# EAGLE board 2 layers lite (EAGLE 8.0.2)
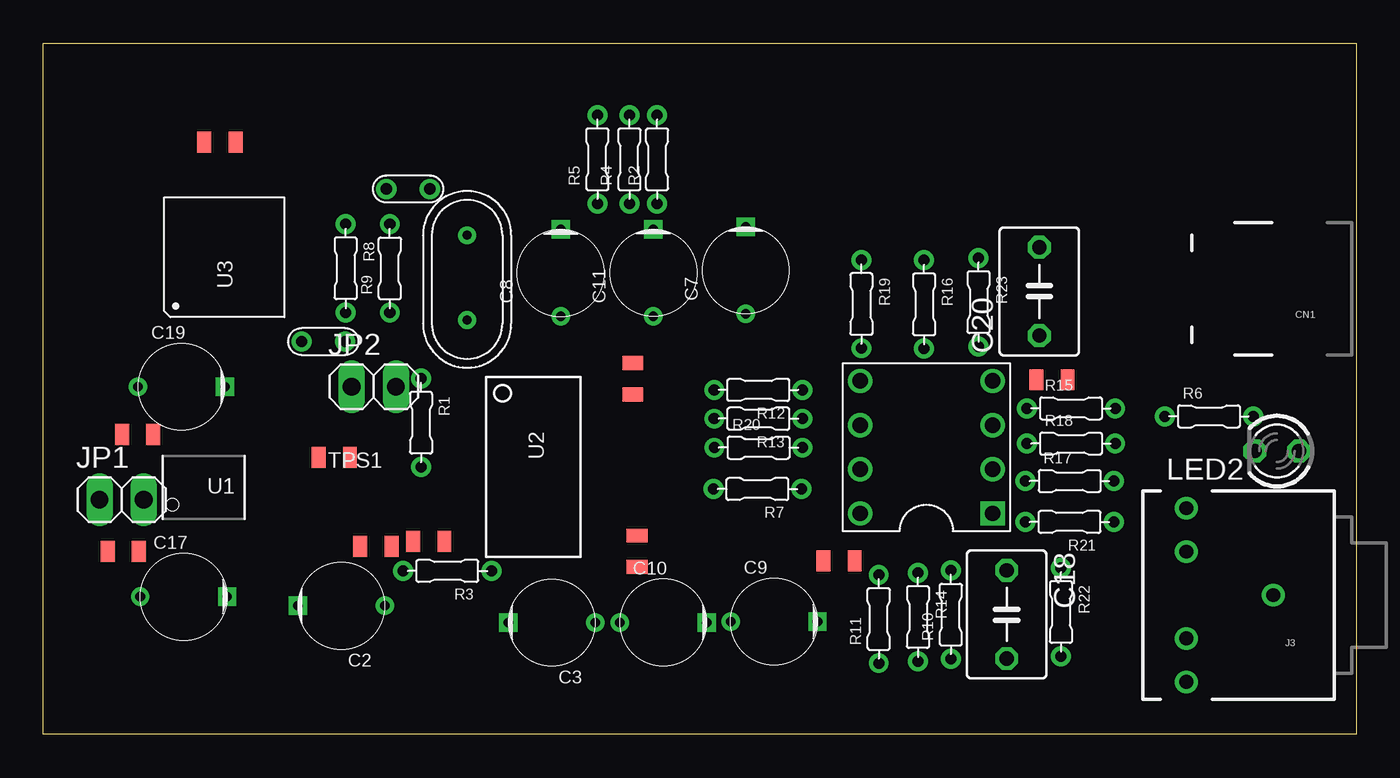
[diagram p0: board, top side]
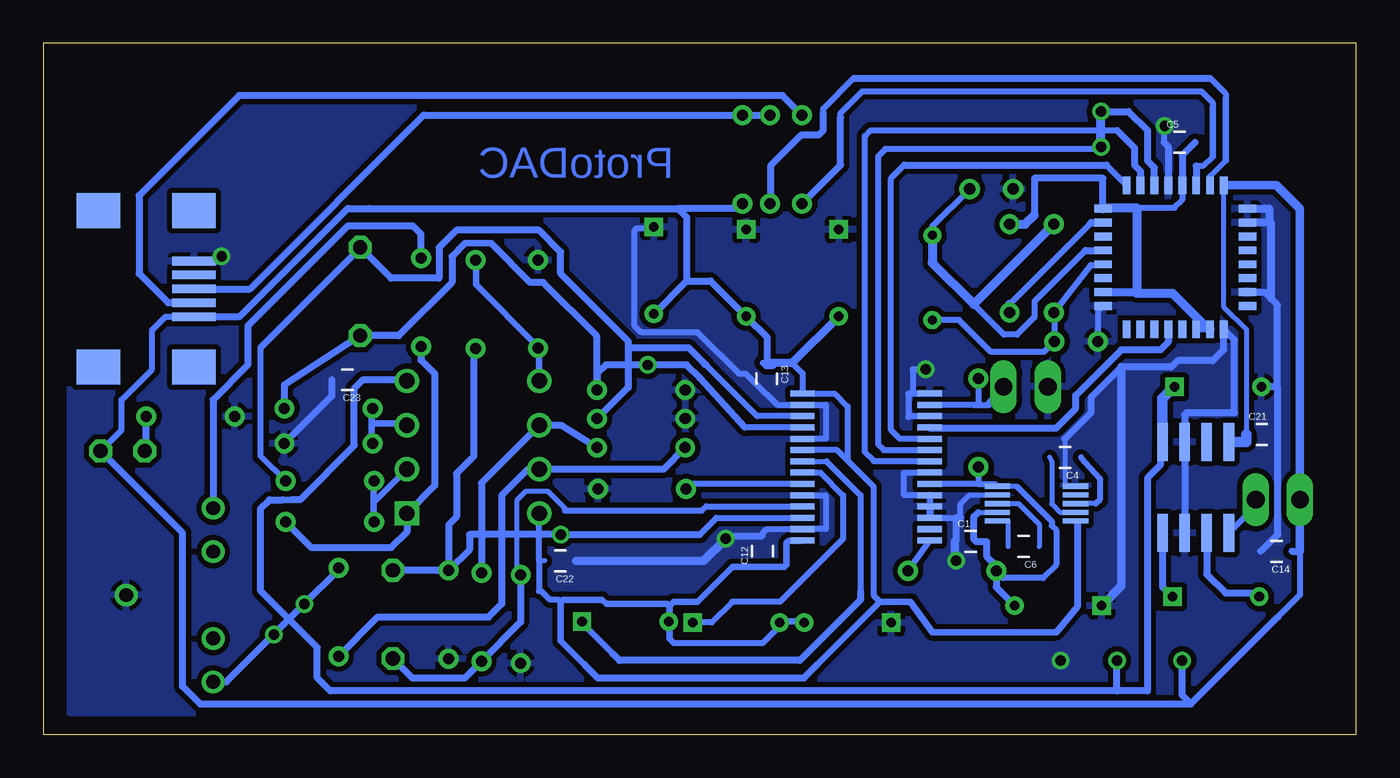
[diagram p1: board, bottom side, seen from below]

Size 75.5 x 39.75 mm. Coordinates in mm from the lower left corner, seen from the top.
Outline: 0,39.75 75.5,39.75 75.5,0 0,0 0,39.75
Copper layers (1*16): layer 1 0.035mm / dielectric 1.5mm / Bottom 0.035mm
Design rules "default *": minimum track width 0.25mm, minimum drill 0.5mm, track to track 0.3mm, track to pad 0.3mm, pad to pad 0.3mm, via to via 0.3mm, smd to smd 0.3mm, copper to edge 40mil, drill to drill 8mil, minimum pad ring 10mil, minimum via ring 8mil, stop-mask expansion 4mil, vias tented up to drill 0mil, thermal gap 10mil

## Footprints (pad centres in the part's own frame; a part is rotated, then mirrored left to right if it is on the bottom)
0805 = smd 0.8 x 1.2 bottom: 1 -0.9,0; 2 0.9,0
10UF/16V_PANA_M_CAP = drill 0.55 pad 0.95: + -2.5,0 | drill 0.55 pad 0.95 square: - 2.5,0
4.7PF_CAP = drill 0.65 pad 1: 1 -1.25,0; 2 1.25,0
C050-045X075 = drill 0.813 octagon: 1 -2.54,0; 2 2.54,0
USB-MINIB = smd 2.5 x 0.5 bottom: D+ 2.5,0; D- 2.5,0.8; GND 2.5,-1.6; ID 2.5,-0.8; VBUS 2.5,1.6 | smd 2.5 x 2 bottom: MTN1 -3,4.5; MTN2 2.5,4.5; MTN3 -3,-4.5; MTN4 2.5,-4.5
AUDIO-JACK = drill 0.8: RING 5,5; RSH 5,2.5; SLEEVE 0,0; TIP 5,-5; TSH 5,-2.5
1X02 = drill 1.016 long: 1 -1.27,0; 2 1.27,0
LED3MM = drill 0.813 octagon: A -1.27,0; K 1.27,0
DIP-8 = drill 0.889 square: 1 -3.81,0 | drill 0.889: 2 -3.81,-2.54; 3 -3.81,-5.08; 4 -3.81,-7.62; 5 3.81,-7.62; 6 3.81,-5.08; 7 3.81,-2.54; 8 3.81,0
1-8W_RES = drill 0.635 pad 1.143: P$1 2.54,0; P$2 -2.54,0
DGS-10-BOTTOM_LYR = smd 1.45 x 0.3 bottom: 1 -2.25,1; 2 -2.25,0.5; 3 -2.25,0; 4 -2.25,-0.5; 5 -2.25,-1; 6 2.25,-1; 7 2.25,-0.5; 8 2.25,0; 9 2.25,0.5; 10 2.25,1
SOIC-8_BOTTOM-LYR = smd 2.21 x 0.61 bottom: 1 -2.616,1.905; 2 -2.616,0.635; 3 -2.616,-0.635; 4 -2.616,-1.905; 5 2.616,-1.905; 6 2.616,-0.635; 7 2.616,0.635; 8 2.616,1.905
DB_R-PDSO-G28-BOTTOM_LYR = smd 0.348 x 1.397 bottom: 1 -4.225,-3.656; 2 -3.575,-3.656; 3 -2.925,-3.656; 4 -2.275,-3.656; 5 -1.625,-3.656; 6 -0.975,-3.656; 7 -0.325,-3.656; 8 0.325,-3.656; 9 0.975,-3.656; 10 1.625,-3.656; 11 2.275,-3.656; 12 2.925,-3.656; 13 3.575,-3.656; 14 4.225,-3.656; 15 4.225,3.656; 16 3.575,3.656; 17 2.925,3.656; 18 2.275,3.656; 19 1.625,3.656; 20 0.975,3.656; 21 0.325,3.656; 22 -0.325,3.656; 23 -0.975,3.656; 24 -1.625,3.656; 25 -2.275,3.656; 26 -2.925,3.656; 27 -3.575,3.656; 28 -4.225,3.656
PJT_(QFP-32)-BOTTOM_LYR = smd 1 x 0.45 bottom: 1 -4.15,2.8; 2 -4.15,2; 3 -4.15,1.2; 4 -4.15,0.4; 5 -4.15,-0.4; 6 -4.15,-1.2; 7 -4.15,-2; 8 -4.15,-2.8; 17 4.15,-2.8; 18 4.15,-2; 19 4.15,-1.2; 20 4.15,-0.4; 21 4.15,0.4; 22 4.15,1.2; 23 4.15,2; 24 4.15,2.8 | smd 0.45 x 1 bottom: 9 -2.8,-4.15; 10 -2,-4.15; 11 -1.2,-4.15; 12 -0.4,-4.15; 13 0.4,-4.15; 14 1.2,-4.15; 15 2,-4.15; 16 2.8,-4.15; 25 2.8,4.15; 26 2,4.15; 27 1.2,4.15; 28 0.4,4.15; 29 -0.4,4.15; 30 -1.2,4.15; 31 -2,4.15; 32 -2.8,4.15
CRYSTAL = drill 0.508 pad 0.889: 1 -4.877,0; 2 0,0

## Placement (x,y rotation side)
C1  150nF  [0805]  22.16,11.09 0 bottom
C2  10uF  [10UF/16V_PANA_M_CAP]  17.13,7.39 180 top
C3  4.7uF  [10UF/16V_PANA_M_CAP]  29.24,6.42 180 top
C4  1uF  [0805]  16.72,15.93 180 bottom
C5  1uf  [0805]  10.15,34.06 0 bottom
C6  1uF  [0805]  19.12,10.8 180 bottom
C7  10uF  [10UF/16V_PANA_M_CAP]  40.39,26.7 90 top
C8  10uF  [10UF/16V_PANA_M_CAP]  29.75,26.54 90 top
C9  47uf  [10UF/16V_PANA_M_CAP]  42.02,6.48 0 top
C10  47uf  [10UF/16V_PANA_M_CAP]  35.65,6.44 0 top
C11  10uF  [10UF/16V_PANA_M_CAP]  35.08,26.55 90 top
C12  150nF  [0805]  34.15,10.53 90 bottom
C13  150nF  [0805]  33.9,20.46 270 bottom
C14  150nF  [0805]  4.59,10.53 180 bottom
C15  4.7pF  [4.7PF_CAP]  20.97,31.37 180 top
C16  4.7pF  [4.7PF_CAP]  16.1,22.6 180 top
C17  47uF  [10UF/16V_PANA_M_CAP]  8.06,7.92 0 top
C18  220pF  [C050-045X075]  55.4,6.9 270 top
C19  47uF  [10UF/16V_PANA_M_CAP]  7.94,20 0 top
C20  220pF  [C050-045X075]  57.28,25.48 90 top
C21  150nF  [0805]  5.42,17.26 0 bottom
C22  220nF  [0805]  45.77,9.98 180 bottom
C23  220nF  [0805]  58.01,20.4 180 bottom
CN1  USB-MINIBBOTTOM  [USB-MINIB]  69.34,25.63 180 top
J3  [AUDIO-JACK]  70.74,8.01 180 top
JP1  [1X02]  4.5,13.5 0 top
JP2  [1X02]  19,20 0 top
LED2  [LED3MM]  70.95,16.3 180 top
OPA2132  OPA2132DIP8  [DIP-8]  50.79,12.71 180 top
R1  10K  [1-8W_RES]  21.72,17.93 270 top
R2  1.5K  [1-8W_RES]  35.3,33.09 90 top
R3  10K  [1-8W_RES]  23.23,9.4 180 top
R4  22R  [1-8W_RES]  33.7,33.09 90 top
R5  22R  [1-8W_RES]  31.86,33.09 90 top
R6  820  [1-8W_RES]  67.04,18.3 0 top
R7  10K  [1-8W_RES]  41.07,14.11 180 top
R8  1M  [1-8W_RES]  17.38,26.81 270 top
R9  1.5K  [1-8W_RES]  19.92,26.81 90 top
R10  22  [1-8W_RES]  52.19,6.89 90 top
R11  22  [1-8W_RES]  48.04,6.64 90 top
R12  22  [1-8W_RES]  41.12,19.81 180 top
R13  22  [1-8W_RES]  41.12,18.16 180 top
R14  100  [1-8W_RES]  50.31,6.74 270 top
R15  100  [1-8W_RES]  59.1,18.76 0 top
R16  100  [1-8W_RES]  50.66,24.74 270 top
R17  100  [1-8W_RES]  59.02,14.57 0 top
R18  820  [1-8W_RES]  59.1,16.73 0 top
R19  820  [1-8W_RES]  47.05,24.75 270 top
R20  820  [1-8W_RES]  41.13,16.49 0 top
R21  820  [1-8W_RES]  59.02,12.22 180 top
R22  10  [1-8W_RES]  58.53,7.04 270 top
R23  10  [1-8W_RES]  53.78,24.86 270 top
TPS1  TPS60501DGS-10-BOTTOM  [DGS-10-BOTTOM_LYR]  18.38,13.27 0 top
U1  LM2662SO8-BOTTOM  [SOIC-8_BOTTOM-LYR]  9.23,14.2 90 top
U2  PCM1794ADB_R-PDSO-G28-BOTTOM  [DB_R-PDSO-G28-BOTTOM_LYR]  28.18,15.38 270 top
U3  PCM2707QFP-32-BOTTOM  [PJT_(QFP-32)-BOTTOM_LYR]  10.4,27.45 90 top
X1  12MHZ  [CRYSTAL]  24.37,28.72 90 top

## Library data of the parts
C1 C4-C6 C12-C14 C21 = SparkFun-Capacitors
C2 C3 C7-C11 C15-C17 C19 R1-R23 X1 = joe's favorites
C18 C20 = resistor
C22 C23 = SparkFun-Capacitors; PROD_ID: CAP-08402; VALUE: 22uF
CN1 J3 = SparkFun-Connectors
JP1 JP2 = pinhead
LED2 = led
OPA2132 = Opamps and Buffers
TPS1 U1-U3 = Audio ICs

## Nets
+5V: C3.+ C7.+ C8.+ C9.+ C10.+ C11.+ C12.1 C13.1 C14.1 C21.1 C22.2 CN1.VBUS JP1.1 LED2.A OPA2132.8 R2.P$2 TPS1.5 U1.8 U2.15 U2.23 U2.28 U3.24
+12V: C20.1 R12.P$2 R15.P$1 U2.25
+15V: C20.2 R13.P$2 R17.P$1 U2.26
+18V: C18.2 R11.P$1 R14.P$1 U2.18
+24V: C18.1 R10.P$1 R16.P$1 U2.17
-5V: C19.- C23.1 OPA2132.4 U1.5
GND: C1.1 C2.- C3.- C5.1 C7.- C8.- C11.- C12.2 C13.2 C14.2 C15.2 C16.2 C19.+ C21.2 C22.1 C23.2 CN1.GND J3.SLEEVE JP2.1 R6.P$2 R7.P$2 R10.P$2 R11.P$2 R12.P$1 R13.P$1 R18.P$1 R19.P$2 TPS1.1 TPS1.9 U1.3 U1.6 U2.1 U2.3 U2.8 U2.10 U2.11 U2.12 U2.16 U2.19 U2.24 U2.27 U3.1 U3.9 U3.20 U3.25 U3.26 U3.31
N$1: C5.2 R9.P$1 U3.2 U3.3 U3.10 U3.16 U3.21
N$2: OPA2132.7 R20.P$2 R22.P$1
N$3: OPA2132.5 R16.P$2 R19.P$1
N$4: C9.- U2.22
N$5: U2.4 U3.5
N$6: J3.TIP R23.P$2
N$7: OPA2132.6 R14.P$2 R20.P$1
N$8: C10.- U2.21
N$9: R5.P$2 U3.22
N$10: CN1.D+ R2.P$1 R4.P$1
N$11: OPA2132.3 R15.P$2 R18.P$2
N$12: LED2.K R6.P$1
N$13: R3.P$2 U2.14
N$14: C15.1 R8.P$2 U3.13 X1.2
N$15: C4.2 TPS1.4
N$16: C4.1 TPS1.3
N$17: C6.2 TPS1.6
N$18: C6.1 TPS1.8
N$19: C16.1 R8.P$1 U3.12 X1.1
N$21: CN1.D- R5.P$1
N$22: U2.6 U3.19
N$23: U2.5 U3.17
N$24: U2.7 U3.18
N$25: R7.P$1 U2.20
N$26: R9.P$2 U3.15
N$27: R4.P$2 U3.23
N$31: OPA2132.2 R17.P$2 R21.P$1
N$32: JP2.2 R1.P$2 U2.2
N$33: JP1.2 U1.1
N$34: J3.RING R22.P$2
N$36: OPA2132.1 R21.P$2 R23.P$1
N$44: C17.+ U1.2
N$45: C17.- U1.4
VCC: C1.2 C2.+ R1.P$1 R3.P$1 TPS1.7 TPS1.10 U2.9

## Tracks (layer width: path | path; a pad name or v marks a point on that pad's centre or on a via)
+5V
  Bottom 0.3: TPS1.5 16.04,12.18 | C21.1 6.32,23.32 7.62,24.62 7.62,31.38 | C22.2 46.98,9.98 47,10 | U2.15 31.88,11.16 31.88,11.12
  Bottom 0.35: OPA2132.8 47,12.69 47,10 47,8.25 46.88,8.25 46.38,7.75 45.88,7.75 45.75,7.62 | 39.25,5.25 34.12,5.25 | 37.88,7.62 35.88,9.62 | 27.38,7.62 27.75,8 27.75,14.25 29.25,15.75 | 45.75,5.38 44.38,4 | 32.44,21.36 31.84,20.76 U2.28 29.98,19.6 29.25,18.88 29.25,15.75 | 29.25,15.75 29.85,16.35 U2.23 | LED2.A 71,17.52 71,19.25 69.25,21 69.25,23.25 68.47,24.03 CN1.VBUS 66.81,24 | 3.23,10.53 3.23,8.02 4.75,6.5
  Bottom 0.381: 7.62,31.38 U3.24 | 31.88,11.12 32.62,11.12 32.75,11 32.75,9.75 32.88,9.62 34.12,9.62 C12.1 34.25,9.62 35.88,9.62 | C3.+ 31.75,6.5 33.12,6.5 C10.+ 33.12,6.25 34.12,5.25 | 39.25,5.25 39.5,5.5 39.5,6.38 C9.+ 39.5,6.62 39.5,7.38 | 37.88,7.62 39.25,7.62 39.5,7.38 | 34.12,21.38 C13.1 | 45.75,5.38 45.75,7.62 45.62,7.75 43.38,7.75 43.12,7.5 39.62,7.5 39.5,7.38 | 31,4 27.38,7.62 25.62,7.62 24.38,5.88 17.25,5.88 16.04,7.33
  Bottom 0.4: R2.P$2 35.59,30.25 39,30.25 | 9.5,1.75 66.5,1.75 67.5,2.75 67.5,11.58 LED2.A | 4.5,6.75 4.75,6.5 9.5,1.75 | CN1.VBUS 64.22,24.03 58,30.25 56.75,30.25 | 44.38,4 43.62,3.25 31.75,3.25 31,4 | 9.5,1.75 10,2.25 10,4.25 | C14.1 3.23,10.53
  Bottom 0.406: 16.04,12.18 16.04,7.33 | 56.75,30.25 39,30.25 38.5,29.75 38.5,26.09 | 38.5,26.09 C7.+ | 38.5,26.09 37.12,26.09 C11.+ 33.9,22.86 C13.1
  Bottom 0.45: C8.+ 32.44,21.36 C13.1
  Bottom 0.5: U3.24 4.59,31.59 3.25,30.25 3.25,13.52 JP1.1 3.23,10.53
  Bottom 0.508: 33.58,21.25 33.9,21.25 C13.1
  Bottom 0.6: C21.1 6.32,16.82 U1.8
+12V  (via drill 0.6 layers 16-16)
  Bottom 0.35: U2.25 35.16,17.66
  Bottom 0.375: 51.25,28.25 49.75,28.25
  Bottom 0.4: 37.75,20.5 38.5,21.25 v40.75,21.25 43.15,21.25 43.65,20.75 43.65,19.83 R12.P$2 43.66,22.91 46.75,26 47.5,26 49.75,28.25 | R15.P$1 61.64,20.11 58.77,21.98 C20.1 55.06,22.94 52,26 52,27.5 51.25,28.25
  Bottom 0.406: 35.16,17.66 37.75,20.5
+15V
  Bottom 0.35: U2.26 34.45,18.3 37.39,21.25 37.5,21.25 | R17.P$1 63,16 63,22.25
  Bottom 0.381: R17.P$1 61.62,14.62
  Bottom 0.4: R13.P$2 41.88,19.95 41.88,22.25 41.88,22.62 45.75,26.5 45.75,27.75 47,29 51.75,29 52.75,28 52.75,26.25 55.51,26.25 C20.2 57.28,27.97 63,22.25
  Bottom 0.406: 41.88,22.25 38.39,22.25 37.39,21.25
+18V
  Bottom 0.3: R11.P$1 48.25,9.18 48.25,13.5 47.75,14 46.5,14 45.5,13 45.5,12.88
  Bottom 0.35: 45.5,12.88 37.62,12.88 37.38,13.12 37.35,13.1 U2.18 | 48.12,9.38 R11.P$1
  Bottom 0.4: R11.P$1 48.04,6.46 R14.P$1 51.26,3.25 54.3,3.25 C18.2
+24V  (via drill 0.6 layers 16-16)
  Bottom 0.35: U2.17 36.8,12.45 37.75,11.5
  Bottom 0.381: 50.75,22.12 R16.P$1
  Bottom 0.4: R10.P$1 52.19,12.06 51.75,12.5 51.75,15 50.75,16 50.75,22.1 R16.P$1 | R10.P$1 52.87,9.43 C18.1 | 50.12,11.5 51,11.5 51,10.62 R10.P$1
  Bottom 0.406: 37.75,11.5 v45.75,11.5 50.12,11.5
-5V
  Bottom 0.381: 61.75,13.5 61.25,13.5
  Bottom 0.4: 61.25,13.5 60.75,13.5 57.62,16.62 57.62,19.89 C23.1 54.67,20.4 OPA2132.4 | 61.75,13.5 62.5,13.5 63,13 63,8.25 59.75,5 59.75,3.25 59,2.5 13.75,2.5 | 13.75,2.5 13.75,4.25 | 12,2.5 13.75,2.5
  Bottom 0.406: U1.5 11.25,16.7 11.25,15.5 12,14.75 12,2.5
  Bottom 0.6: C19.- 11.13,19.31 U1.5
GND  (via drill 0.6 layers 16-16)
  Bottom 0.3: TPS1.9 22.23,13.77 22.75,13.25 | TPS1.1 16.75,14.27 16.75,17
  Bottom 0.35: C7.- 40.5,29.12 41.38,29.12 41.5,29 41.5,23.5 41.12,23.12 37.88,23.12 35.5,20.75 35.12,20.75 34,19.62 C13.2 33.29,18.95 U2.27 30.5,18.95 30.5,17 U2.24 | 33.77,11.8 U2.16 30.5,11.8 30.5,13.75 30.51,13.76 U2.19 | 33.77,11.8 arc-90 C12.2 arc90 33.77,11.8 | 25.5,19.6 U2.1 | U2.3 25.7,18.3 25.75,18.25 25.75,19.6 25.5,19.6 | U3.9 14.85,24.35 C16.2 | U2.11 U2.10 26,13.75 26,15.05 U2.8 | v24.75,21 25.5,21 25.5,19.6 | 22.75,12.45 22.75,13.25 | U2.12 23,12.45 | v11,35 11.05,34.95 C5.1
  Bottom 0.381: U3.26 6.25,29.5
  Bottom 0.4: C23.2 58.91,19.46 R18.P$1 | C5.1 10.8,33.82 U3.20 | C21.2 4.52,11.52 4.5,11.5 4.52,11.5 C14.2 | CN1.GND 65.25,27.23 v65.25,27.5 | 16.75,17 15.25,18.5 15.25,19.38 13.5,21.12 10.62,21.12 10.25,21.5 | C19.+ 4.52,20
  Bottom 0.406: 22.75,12.45 23,12.45 23,11.15 C1.1 | U3.31 5.25,25.45 4.9,25.1 4.52,24.72 4.52,20 C21.2 | U2.10 | U2.11 U2.12 | U1.3 U1.6 9.86,18.39 9.75,18.5 7,18.5 7,22.7 U3.1 7.6,22.15 8.25,21.5 10.25,21.5 | C12.2 36.07,11.43 v36.25,11.25
  Bottom 0.45: U3.25 5.25,30.24 5.25,30.25 5,30.25 5,29.5 | 5,29.5 5.05,29.45 U3.26 | 5,29.5 4.9,29.4 4.9,25.1
  Bottom 0.5: C22.1 37.52,9.98 v36.25,11.25 | C1.1 23.06,10.06 v23,10 | 13.5,21.12 13.5,8.53 C2.-
  other vias: 17,4.25
  pour Bottom: 1.5,38.25 74,38.25 74,1.25 1.5,1.25
N$1
  Bottom 0.33: U3.3 U3.2
  Bottom 0.35: 12.62,30.3 10.45,30.3 10,30.75 U3.21
  Bottom 0.4: 18.53,29.86 18.5,29.86 18.5,32 14.55,32 U3.16 | C5.2 10,33.31 U3.21
  Bottom 0.45: U3.10 12.69,25.45 arc90 12.62,25.38
  Bottom 0.508: U3.2 8.5,23.32 10.56,25.38 12.62,25.38 12.62,30.3 14.53,30.3 U3.16 14.46,30.33 | R9.P$1 19.04,29.35 18.53,29.86
N$2
  Bottom 0.4: R20.P$2 39.83,15.25 OPA2132.7 47.64,15.25 49.14,13.75 49.14,7.5 49.89,6.75 56.27,6.75 R22.P$1
N$3
  Bottom 0.381: OPA2132.5 47,20.38 47,22.12 R19.P$1 47.12,22.38 50.62,25.88 50.62,27.25 R16.P$2
N$4
  Bottom 0.3: U2.22 30.45,15.7
  Bottom 0.35: 28.5,8.25 28.5,13.75 30.45,15.7
  Bottom 0.381: 42.75,4.62 44.5,6.38 C9.-
  Bottom 0.4: 42.75,4.62 42.38,4.25 32,4.25 28.5,7.75 28.5,8.25
N$5
  Bottom 0.4: U3.5 10.8,22.58 11.25,22.12 13.5,22.12 16.12,19.5 16.12,18.75 17.25,17.62 24.49,17.62 U2.4
N$6
  Bottom 0.35: J3.TIP
  Bottom 0.4: R23.P$2 53.78,28.78 54.25,29.25 58,29.25 63.75,23.5 63.75,21.25 65.75,19.25 65.74,19.24 J3.TIP
N$7
  Bottom 0.381: 47,17.75 OPA2132.6
  Bottom 0.4: OPA2132.6 50.31,14.46 R14.P$2
  Bottom 0.406: OPA2132.6 45.72,17.79 R20.P$1
N$8
  Bottom 0.35: C10.- 37.06,6.44 35.88,7.62 33.12,7.62 29.5,11.25 29.5,13.75 30.8,15.05 U2.21
  Bottom 0.381: C10.- 38.12,6.5
N$9
  Bottom 0.35: 8.25,33.25 8.8,32.7 9.2,32.7 | 29.65,35.5 29.65,35.75 28.4,37 8.89,37 8.25,36.35 8.25,36.1
  Bottom 0.375: 8.25,36.1 8.25,33.25
  Bottom 0.4: R5.P$2 29.65,32.76 29.65,35.5 | 9.2,32.7 U3.22
N$10
  Bottom 0.4: R4.P$1 R2.P$1 53.62,35.62 63.62,25.63 CN1.D+
N$11
  Bottom 0.381: 56.62,17.88 56.62,18.75 R15.P$2 | 56.62,17.88 56.62,16.75 R18.P$2 | 56.62,17.88 54.62,17.88 OPA2132.3
N$12
  Bottom 0.406: LED2.K 69.58,16.4 R6.P$1
N$13
  Bottom 0.35: R3.P$2 U2.14
N$14
  Bottom 0.35: 21.99,24.75 21.99,24.74 20.25,23 19.5,23 18.5,24 18.5,24.9 15.64,27.76 | C15.1 24.37,29.23 X1.2
  Bottom 0.4: 15.64,27.76 15.56,27.84 U3.13
  Bottom 0.508: X1.2 24.37,27.13 21.99,24.75 R8.P$2
N$15
  Bottom 0.3: C4.2 17.5,15.69 17.5,13.25 17.02,12.77 TPS1.4
N$16
  Bottom 0.3: 14.98,13.27 TPS1.3
  Bottom 0.35: C4.1 14.75,14.73 14.75,13.5 14.98,13.27
N$17
  Bottom 0.3: TPS1.6 20.02,12.27 C6.2
N$18
  Bottom 0.3: TPS1.8 19.42,13.27 18.22,12.08 C6.1
N$19
  Bottom 0.35: U3.12 14.59,27 15.25,27 R8.P$1 17.35,24.23 C16.1 17.95,22 21,22 22.84,23.84 X1.1
N$21
  Bottom 0.4: R5.P$1 32.98,36.75 64.25,36.75 70,31 70,26.5 68.33,24.83 CN1.D-
N$22  (via drill 0.6 layers 16-16)
  Bottom 0.35: U2.6 27.16,16.35 27.5,16.69 27.5,33.25 27.08,33.67 14.79,33.67 v14.67,33.79
  Bottom 0.4: U3.19 11.6,32.6 12,33 12,34.75 13.08,35.83 v14.67,35.83
  Bottom 0.508: v14.67,33.79 v14.67,35.83
N$23
  Bottom 0.35: U2.5 26.24,17.01 | 14.35,32.75 U3.17 | 26.24,17.01 | 26.24,17.01 26.75,17.51 26.75,31.99 25.99,32.75
  Bottom 0.4: 25.99,32.75 14.35,32.75
N$24
  Bottom 0.35: U2.7 27.74,15.7 27.74,15.74 28.25,16.25 28.25,34.43 27.93,34.75 13.75,34.75
  Bottom 0.4: 13.75,34.75 12.75,33.75 12.75,32.75 12.4,32.4 U3.18
N$25
  Bottom 0.35: U2.20 38.23,14.41
  Bottom 0.406: 38.23,14.41 R7.P$1
N$26
  Bottom 0.35: 15.32,29.35 19.92,24.75 R9.P$2
  Bottom 0.4: 15.32,29.35 15.23,29.45 U3.15
  Bottom 0.508: R9.P$2 19.92,24.75
N$27
  Bottom 0.3: 8.4,32.1 7.5,33
  Bottom 0.35: 30.65,35.75 30.65,36 28.9,37.75 | 8.39,37.75 7.5,36.85 7.5,36.6
  Bottom 0.375: 7.5,36.6 7.5,33 | U3.23 8.4,32.1
  Bottom 0.4: R4.P$2 33.65,30.6 33.65,32.75 31.9,34.5 30.9,34.5 30.65,34.75 30.65,35.75 | 28.9,37.75 8.39,37.75
N$29  (via drill 0.6 layers 16-16)
  other vias: 13.75,4.25
N$30  (via drill 0.6 layers 16-16)
  other vias: 10,4.25
N$31
  Bottom 0.381: 56.5,13.5 56.5,14.5 R17.P$2 | 56.5,13.5 56.5,12.25 R21.P$1 | OPA2132.2 54.62,15.25 56.38,13.5 56.5,13.5
N$32
  Bottom 0.35: 22,18.95 U2.2 | 22,18.95 21.25,18.95 | 21.25,18.95 21.06,18.95 | R1.P$2 21.72,18.95 22,18.95 | 21.25,18.95 JP2.2
N$33
  Bottom 0.35: JP1.2 5.77,13.14 U1.1
N$34  (via drill 0.6 layers 16-16)
  Bottom 0.4: R22.P$2 58.53,9.48 v60.5,7.5 v62.25,5.75 64.99,3.01 J3.RING
N$36
  Bottom 0.4: R21.P$2 60.09,10.75 55.5,10.75 54.6,11.65 | R23.P$1 53.78,21.53 53,20.75 53,14.31 OPA2132.1
  Bottom 0.406: OPA2132.1 54.6,11.65
N$44
  Bottom 0.4: U1.2 8.59,9.21 7.5,8.12 5.77,8.12 C17.+
N$45
  Bottom 0.4: U1.4 11.13,8.48 C17.-
VCC
  Bottom 0.3: 21.75,12.75 21.73,12.77 TPS1.7 | 19.5,14.25 19.52,14.27 TPS1.10 20.77,14.41
  Bottom 0.35: 19.6,7.39 C2.+ | 19.5,14.25 17.5,12.25 17.5,12 17.25,11.75 17.25,9.75 18,9 20.29,9 R3.P$1 | 21.72,14.41 20.77,14.41 | 21.72,14.41 U2.9 | R1.P$1 21.72,14.41
  Bottom 0.406: C2.+ 20.7,8.45 R3.P$1 20.7,9.7 21.25,10.25 C1.2 21.84,11.09 22,11.25 22,12.5 21.75,12.75

## Text on the board
Route15: 3.3 | +5 | -5 | GND
Bottom: ProtoDAC